# Altium PCB CAT24C32 Breakout.PcbDoc
Units mil, origin at the board's own origin, x right, y up, seen from the top; angles counter-clockwise.
Board outline 1695.03 x 1070.03 mil, 2 copper layers (Top Layer, Bottom Layer); 11 components, 11 nets, 35 pads, 0 vias.
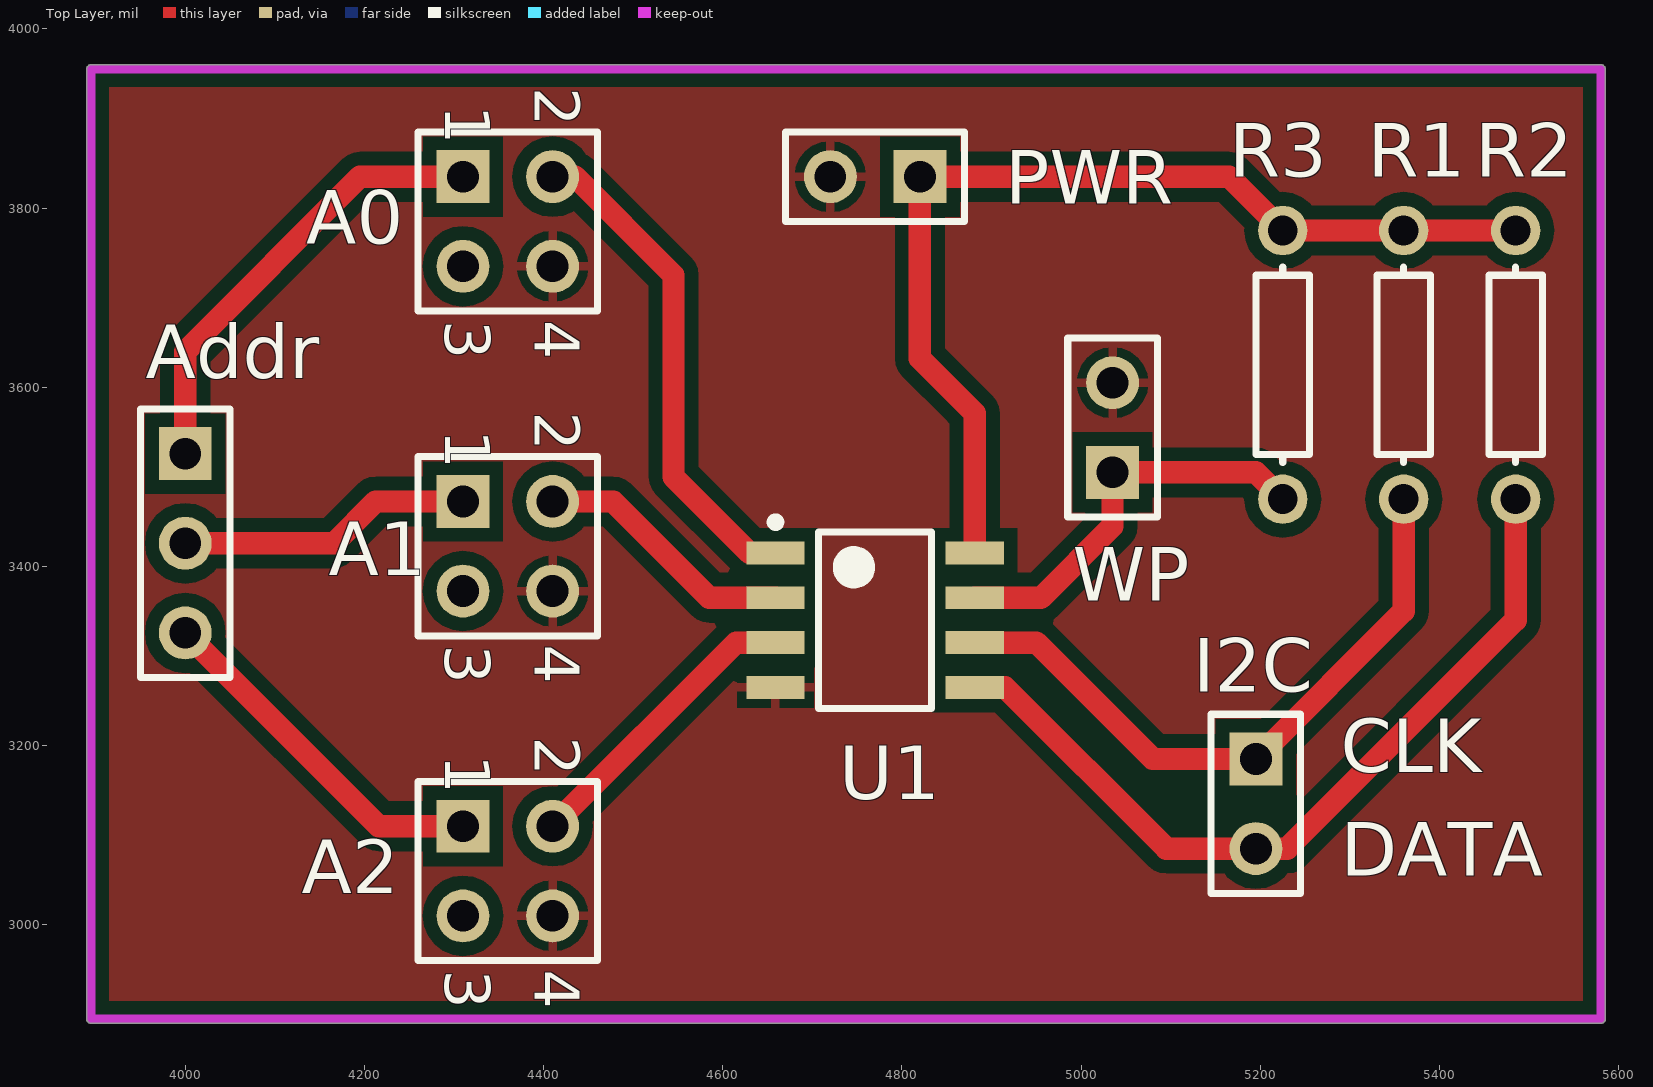
[diagram p0: Top Layer view]
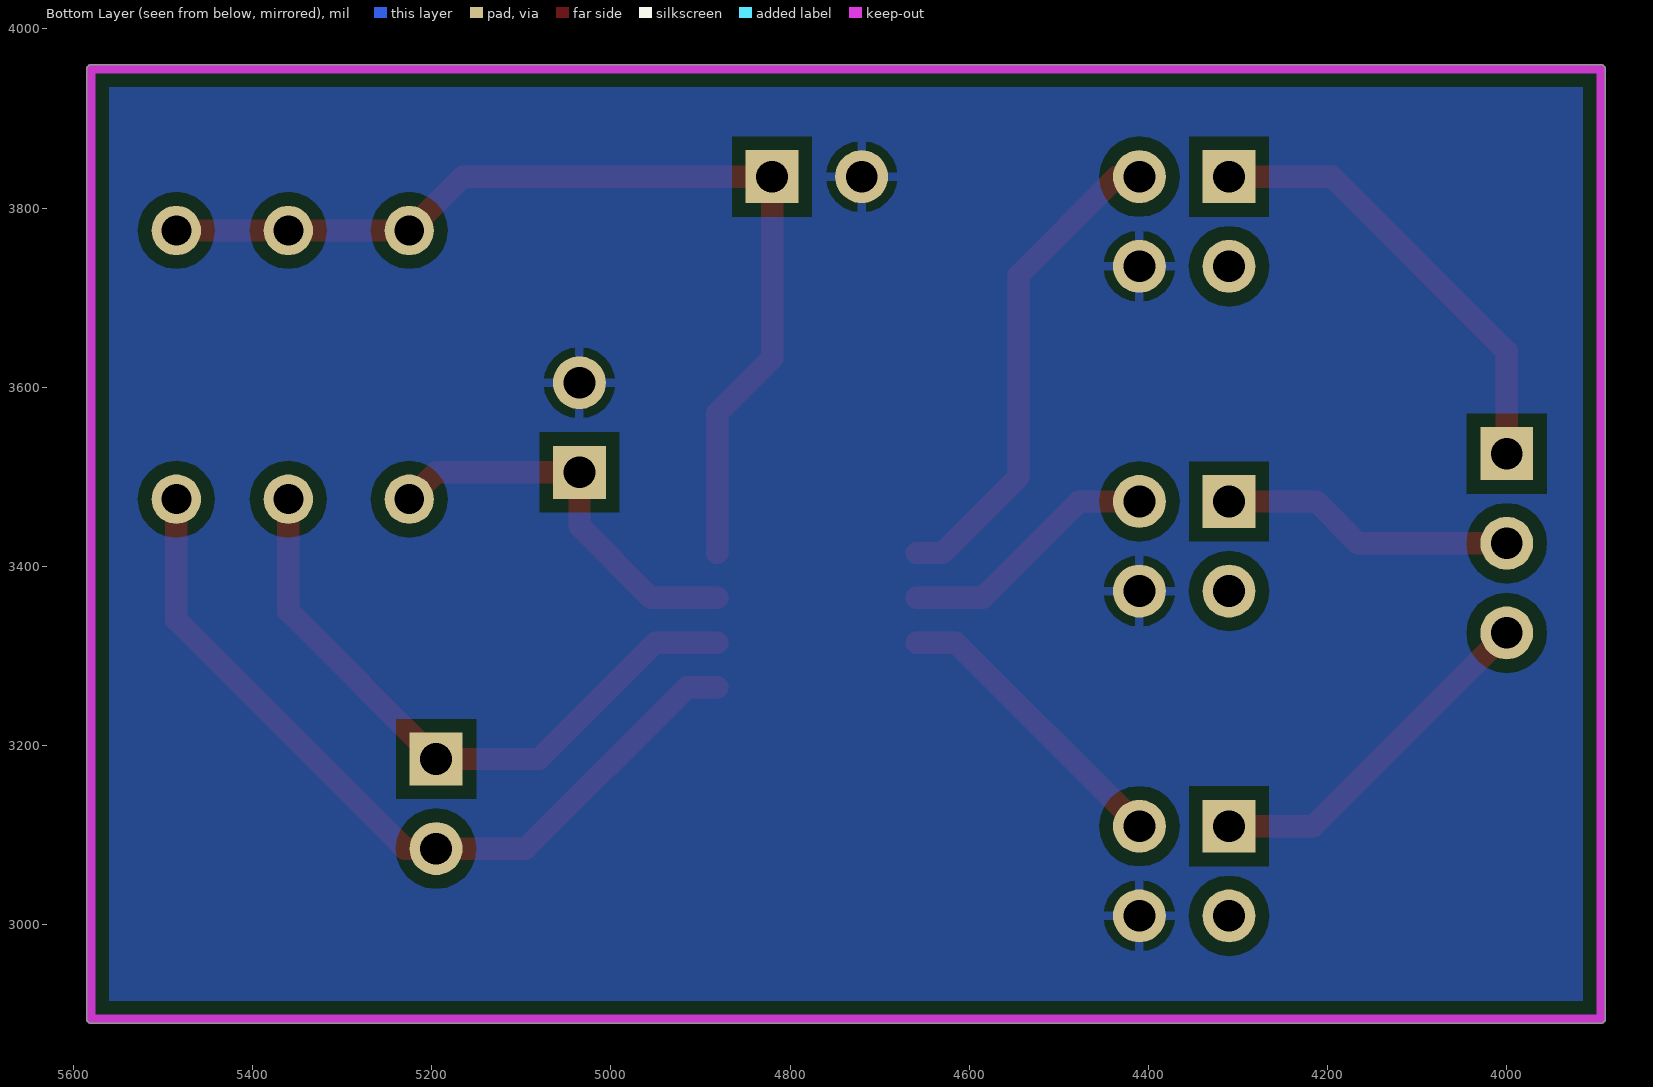
[diagram p1: Bottom Layer view, seen from below]

## Layer stack, top to bottom
Top Solder: solder mask 0.4, Solder Resist, Dk 3.5
Top Layer: signal copper 1.4
Dielectric 1: dielectric 12.6, FR-4, Dk 4.8
Bottom Layer: signal copper 1.4
Bottom Solder: solder mask 0.4, Solder Resist, Dk 3.5

## Board outline
3889.99,2895 ccw(c3895,2895) 3895,2889.99 5580,2889.99 ccw(c5580,2895) 5585.02,2895 5585.02,3955 ccw(c5580,3955) 5580,3960.01 3895,3960.01 ccw(c3895,3955) 3889.99,3955

## Design rules (kind name [scope] priority, off if disabled: settings)
Clearance [All] p1: gap=15
PolygonConnect [All] p1: connectstyle=Relief reliefconductorwidth=10 reliefentries=4 polygonreliefangle="90 Angle" airgapwidth=10
RoutingVias [All] p1: holewidth=28 width=50 viastyle="Through Hole" minholewidth=28 minwidth=50 maxholewidth=28 maxwidth=50
SolderMaskExpansion [All] p1: expansion=4
Width [All] p1: maxlimit=100 minlimit=10 preferedwidth=10 minimp=50.000000 maximp=50.000000 favimp=50.000000
30 further rules are at their usual default settings.

## Components (designator, comment, footprint, x,y, rotation, side; value= is the part's Value field where it differs from the comment)
A0 "Header 2X2" HDR2X2 4310,3835 r270 top
A1 "Header 2X2" HDR2X2 4310,3472.5 r270 top
A2 "Header 2X2" HDR2X2 4310,3110 r270 top
Addr "Header 3" HDR1X3 4000,3525.84 r270 top
I2C "Header 2" HDR1X2 5195,3185 r270 top
PWR "Header 2" HDR1X2 4820,3835 r180 top (schematic designator Power)
R1 "Res1" AXIAL-0.3 5360,3625 r90 top
R2 "Res1" AXIAL-0.3 5485,3625 r90 top
R3 "Res1" AXIAL-0.3 5225,3625 r90 top
U1 "CAT24C32WI-G" CAT24C32WI-G 4770,3340 r0 top
WP "Header 2" HDR1X2 5035,3505 r90 top

## Footprints (in the part's own frame and the unit in brackets; to place one, negate y for a bottom-side part, rotate by r counter-clockwise, add the part's x,y. Pads: shape width x height; smd on the part's side, far side on the other; paste and mask are expansions set on the pad)
AXIAL-0.3 [mm] "Axial Device, Thru-Hole; 2 Leads; 0.3 in Pin Spacing"
  round 1.4 hole 0.85: 1(-3.81,0) 2(3.81,0)
  silkscreen extent -2.77,-0.76 2.77,0.76
CAT24C32WI-G [mm] "SOIC, 8-Leads, Body 4.90x3.90mm, Pitch 1.27mm, IPC Low Density"
  rect 1.65x0.65 smd: 1(-2.825,1.905) 2(-2.825,0.635) 3(-2.825,-0.635) 4(-2.825,-1.905) 5(2.825,-1.905) 6(2.825,-0.635) 7(2.825,0.635) 8(2.825,1.905)
  silkscreen extent -2.95,-2.5 1.6,2.9, body extent -2,-2.5 2,2.5, height 1.75
HDR1X2 [mm] "Connector; Header; 2 Position"
  rect 1.5x1.5 hole 0.9: 1(0,0)
  round 1.5 hole 0.9: 2(2.54,0)
  silkscreen extent -1.27,-1.27 3.81,1.27
HDR1X3 [mm] "Connector; Header; 3 Position"
  rect 1.5x1.5 hole 0.9: 1(0,0)
  round 1.5 hole 0.9: 2(2.54,0) 3(5.08,0)
  silkscreen extent -1.27,-1.27 6.35,1.27
HDR2X2 [mm] "Connector; Header; 2x2 Position"
  rect 1.5x1.5 hole 0.9: 1(0,0)
  round 1.5 hole 0.9: 2(0,2.54) 3(2.54,0) 4(2.54,2.54)
  silkscreen extent -1.27,-1.27 3.81,3.81

## Part data
A0 A1 A2: "Header, 2-Pin, Dual row"
Addr: "Header, 3-Pin"
I2C PWR WP: "Header, 2-Pin"
R1 R2 R3: "Resistor"
U1: "IC EEPROM 32KBIT 400KHZ 8SOIC"

## Nets (pads, with @x,y where several pads share a name; then routed paths per layer and width w, separated by ;. In a path a pad name is that pad's centre, name@x,y a point inside that pad or via, vN(x,y) a via of type N, cw(c..) or ccw(c..) an arc to the next point about the centre after c; other vN are vias at no path point)
3V3: PWR.1 R1.2 R2.2 R3.2 U1.8 | length 1135.2
  Top Layer w25: U1.8 4881.22,3570.87 4868.43,3583.66 4820,3632.09 PWR.1 5165,3835 R3.2 R1.2 R2.2
GND: A0.4 A1.4 A2.4 PWR.2 U1.4 WP.2
ID_SC: I2C.1 R1.1 U1.6 | length 726
  Top Layer w25: U1.6 4950,3315 5080,3185 I2C.1 5360,3350 R1.1
ID_SD: I2C.2 R2.1 U1.5 | length 919
  Top Layer w25: U1.5 4915,3265 5095,3085 I2C.2 5230,3085 5485,3340 R2.1
NetA0_1: A0.1 Addr.1 | length 504.9
  Top Layer w25: Addr.1 4000,3640 4195,3835 A0.1
NetA0_2: A0.2 U1.1 | length 554.6
  Top Layer w25: A0.2 4435,3835 4545,3725 4545,3500 4630,3415 U1.1
NetA1_1: A1.1 Addr.2 | length 329.3
  Top Layer w25: Addr.2 4165.84,3425.84 4212.5,3472.5 A1.1
NetA1_2: A1.2 U1.2 | length 293.3
  Top Layer w25: A1.2 4477.5,3472.5 4585,3365 U1.2
NetA2_1: A2.1 Addr.3 | length 399.4
  Top Layer w25: Addr.3 4215.84,3110 A2.1
NetA2_2: A2.2 U1.3 | length 333.7
  Top Layer w25: A2.2 4615,3315 U1.3
WP: R3.1 U1.7 WP.1 | length 449.3
  Top Layer w25: U1.7 4955,3365 5035,3445 WP.1 5195,3505 R3.1
pads on no net: A0.3 A1.3 A2.3

## Polygon pours and split planes (outlines as drawn)
GND on Top Layer "GND_L01_P002" (solid, remove dead copper, pour order 2): 5580,2895 5580,3955 3895,3955 3895,2895
GND on Bottom Layer "GND_L02_P004" (solid, remove dead copper, pour order 4): 5565,2880 5565,3940 3880,3940 3880,2880

## Keep-outs
Keep-Out Layer:
  lines w10: 3895,2895 5580,2895 5580,3955 3895,3955 3895,2895

## Silkscreen, mask and mechanical layers (free items; w line width, h text height)
Top Overlay:
  text "CLK" at 5290,3170 h60
  text "DATA" at 5290,3055 h60
Mechanical 1:
  lines w10: 3895,2895 5580,2895 5580,3955 3895,3955 3895,2895

## Text inside footprints (layer, text, board x,y; h text height)
A0: Top Overlay "3" at 4290,3675 h50 r270; Top Overlay "4" at 4390,3675 h50 r270; Top Overlay "2" at 4390,3935 h50 r270; Top Overlay "1" at 4290,3915 h50 r270
A1: Top Overlay "3" at 4290,3312.5 h50 r270; Top Overlay "4" at 4390,3312.5 h50 r270; Top Overlay "2" at 4390,3572.5 h50 r270; Top Overlay "1" at 4290,3552.5 h50 r270
A2: Top Overlay "3" at 4290,2950 h50 r270; Top Overlay "4" at 4390,2950 h50 r270; Top Overlay "2" at 4390,3210 h50 r270; Top Overlay "1" at 4290,3190 h50 r270